# EAGLE board InkTime_2D-PCB (EAGLE 9.7.0)
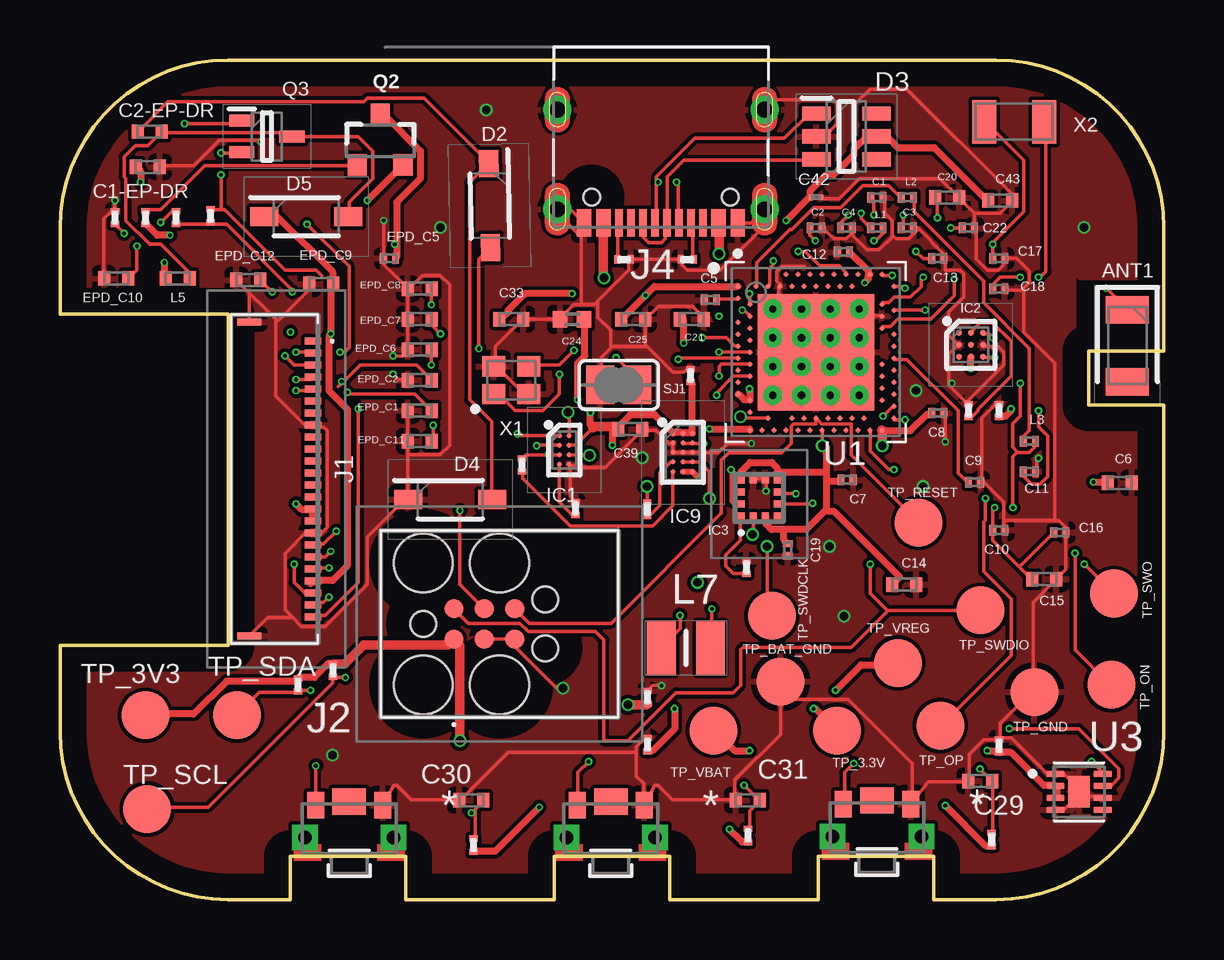
[diagram p0: board, top side]
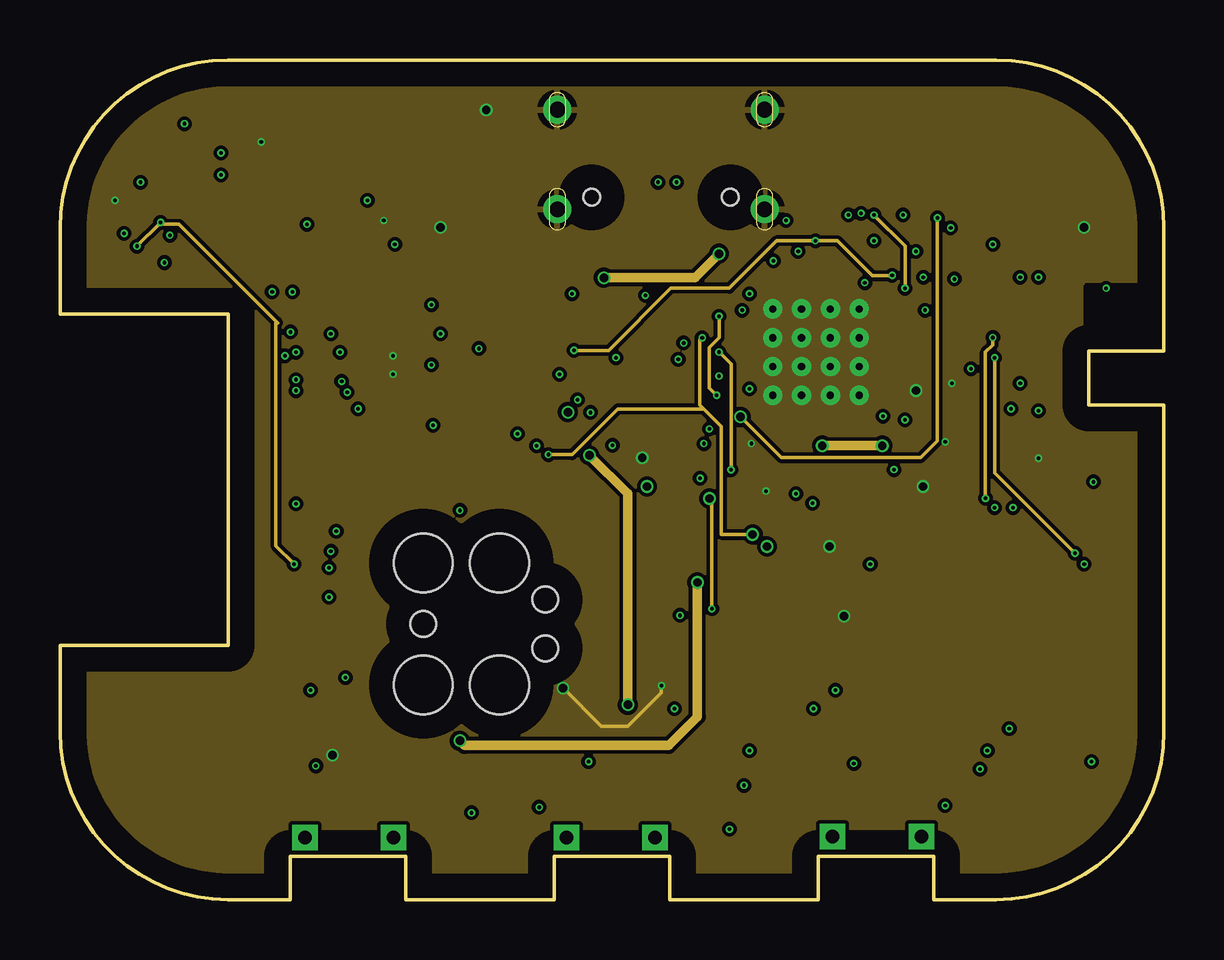
[diagram p1: board, inner layer Route2]
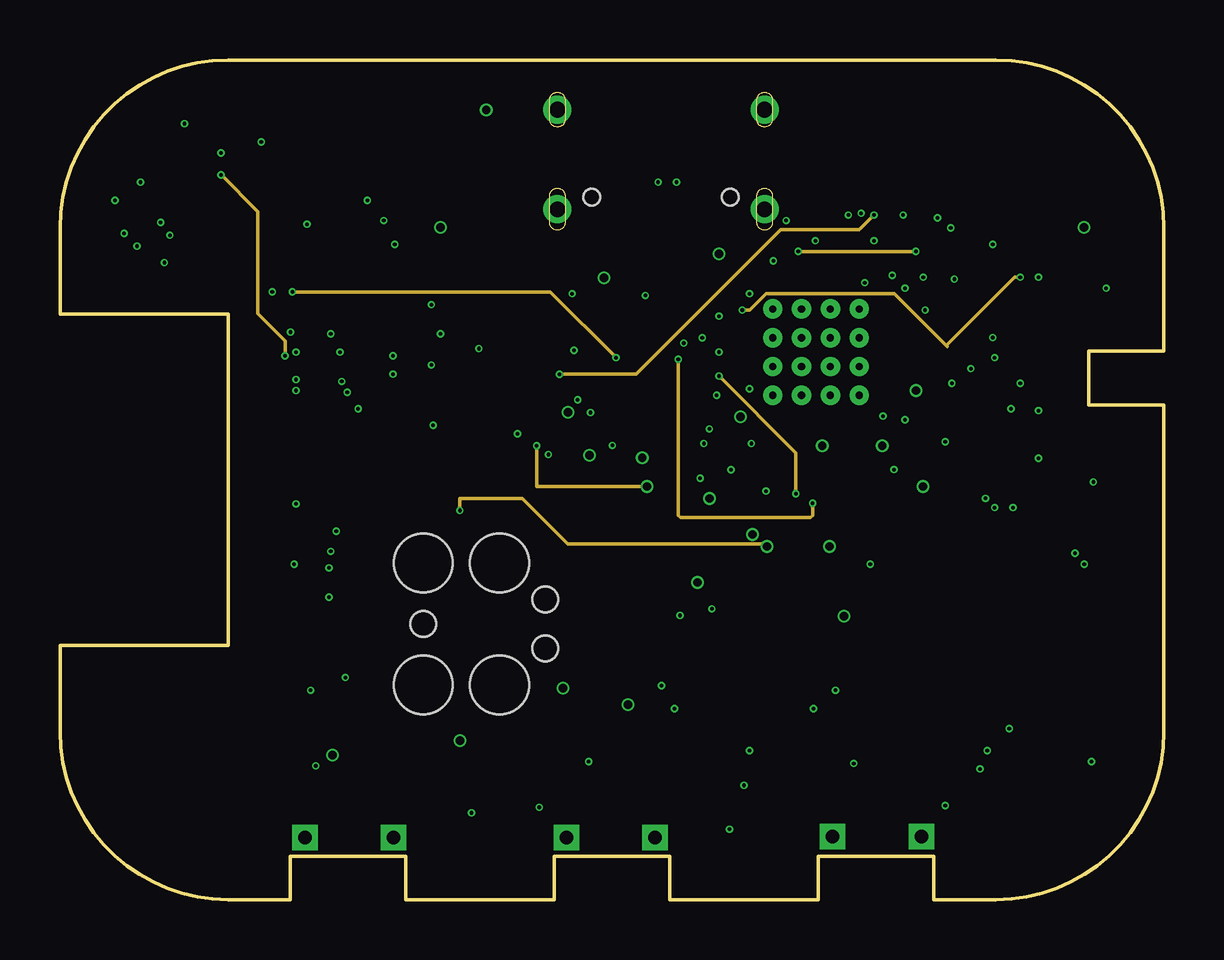
[diagram p2: board, inner layer Route15]
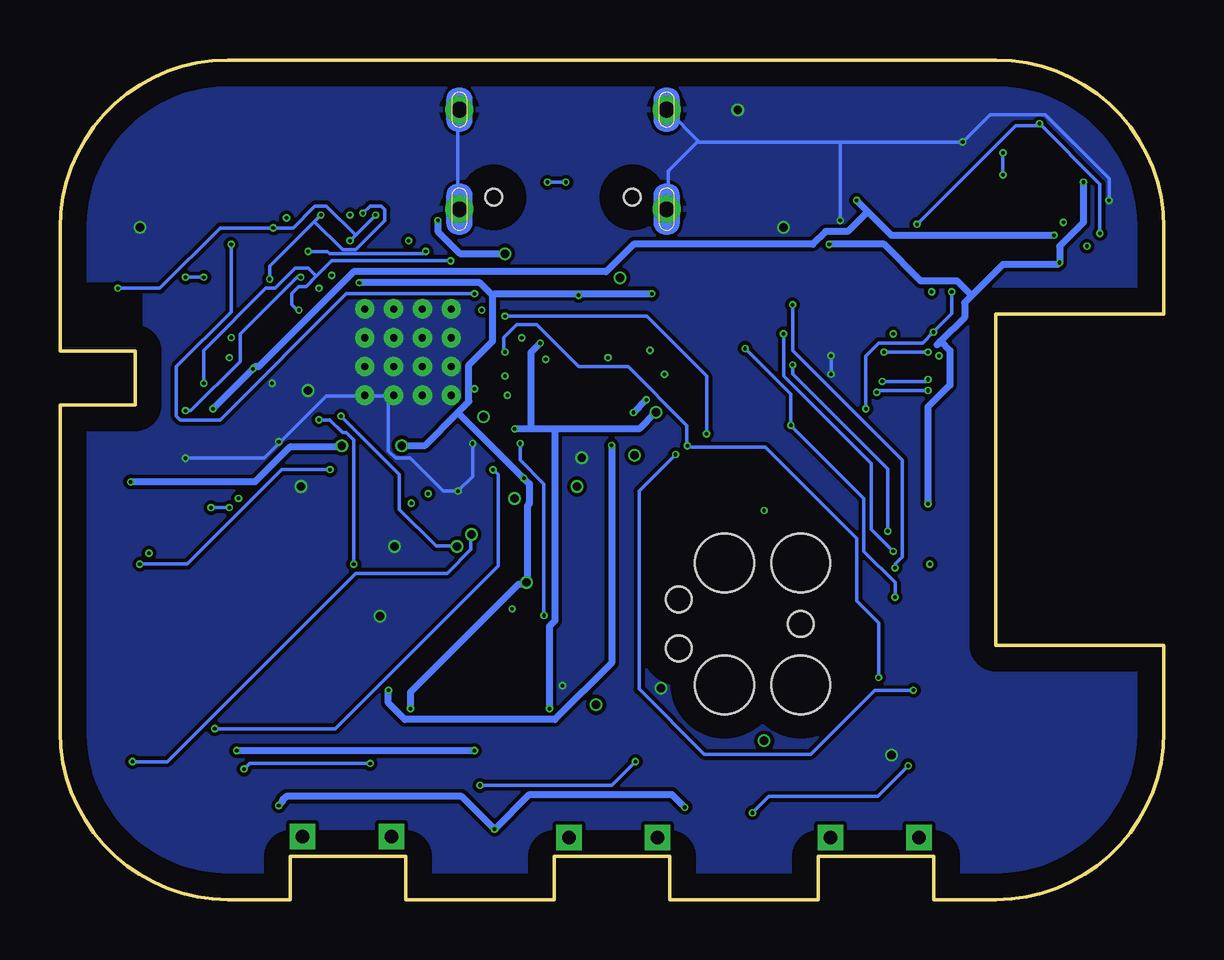
[diagram p3: board, bottom side, seen from below]

Size 46 x 35 mm. Coordinates in mm from the lower left corner, seen from the top.
Outline: 39,0 36.4,0 36.4,1.8 31.6,1.8 31.6,0 25.4,0 25.4,1.8 20.6,1.8 20.6,0 14.4,0 14.4,1.8 9.6,1.8 9.6,0 7,0 arc-90 0,7 0,10.6 7,10.6 7,24.4 0,24.4 0,28 arc-90 7,35 39,35 arc-90 46,28 46,22.87 42.86,22.87 42.86,20.62 46,20.62 46,7 arc-90 39,0
Copper layers (1+2*15+16): Top 0.035mm / dielectric 1.5mm / Route2 0.035mm / dielectric 0.15mm / Route15 0.035mm / dielectric 0.2mm / Bottom 0.035mm
Design rules "Fusion Electronics Design Rules *": minimum track width 6mil, minimum drill 0.15mm, track to track 6mil, track to pad 6mil, pad to pad 6mil, via to via 6mil, smd to smd 6mil, copper to edge 40mil, drill to drill 6mil, minimum pad ring 10mil, minimum via ring 0.075mm, stop-mask expansion 4mil, vias tented up to drill 9999mil, thermal gap 10mil
Net classes: 0 default: width 0.15 mm; 1 Putere: width 0.3 mm

## Footprints (pad centres in the part's own frame; a part is rotated, then mirrored left to right if it is on the bottom)
2450AT18B100E_ANTC3216X140N = smd 1.15 x 1.8: 1 -1.5,0; 2 1.5,0
NORDIC_NRF_3_RESC0201_L = smd 0.28 x 0.43: 1 -0.255,0; 2 0.255,0
NORDIC_NRF_3_RESC0402_L = smd 0.5 x 0.6: 1 -0.5,0; 2 0.5,0
GRM011R60J152KE01L_1_0201 = smd 0.35 x 0.25: 1 0,0.275; 2 0,-0.275
PERFECT_0402_0402 = smd 0.6 x 0.7: 1 -0.5,0; 2 0.5,0
GRM011R60J152KE01L_2_CAPC0201X13N = smd 0.22 x 0.23: 1 -0.185,0; 2 0.185,0
ESP32_C6_LIBRARY_5_SOD3716X135N = smd 1.15 x 0.8: 1 -1.75,0; 2 1.75,0
ESP32_C6_LIBRARY_3_SOT95P280X145-6N = smd 1.2 x 0.6: 1 -1.25,0.95; 2 -1.25,0; 3 -1.25,-0.95; 4 1.25,-0.95; 5 1.25,0; 6 1.25,0.95
BQ25180YBGR_BGA8C40P2X4_100X155X50 = smd 0.2 x 0.2: A1 -0.2,0.6; A2 0.2,0.6; B1 -0.2,0.2; B2 0.2,0.2; C1 -0.2,-0.2; C2 0.2,-0.2; D1 -0.2,-0.6; D2 0.2,-0.6
DRV2605YZFR_BGA9C50P3X3_144X144X62 = smd 0.25 x 0.25: A1 -0.5,0.5; A2 0,0.5; A3 0.5,0.5; B1 -0.5,0; B2 0,0; B3 0.5,0; C1 -0.5,-0.5; C2 0,-0.5; C3 0.5,-0.5
BMA423_BMA423 = smd 0.3 x 0.35: 1 -0.75,-0.775; 2 -0.25,-0.775; 3 0.25,-0.775; 4 0.75,-0.775; 7 0.75,0.775; 8 0.25,0.775; 9 -0.25,0.775; 10 -0.75,0.775 | smd 0.35 x 0.3: 5 0.775,-0.25; 6 0.775,0.25; 11 -0.775,0.25; 12 -0.775,-0.25
RT6160AWSC_BGA15C40P3X5_140X230X60 = smd 0.216 x 0.216: A1 -0.4,0.8; A2 0,0.8; A3 0.4,0.8; B1 -0.4,0.4; B2 0,0.4; B3 0.4,0.4; C1 -0.4,0; C2 0,0; C3 0.4,0; D1 -0.4,-0.4; D2 0,-0.4; D3 0.4,-0.4; E1 -0.4,-0.8; E2 0,-0.8; E3 0.4,-0.8
503480-2400_5034802400 = smd 0.3 x 0.7: 1 -5.75,1.525; 2 -5.25,1.525; 3 -4.75,1.525; 4 -4.25,1.525; 5 -3.75,1.525; 6 -3.25,1.525; 7 -2.75,1.525; 8 -2.25,1.525; 9 -1.75,1.525; 10 -1.25,1.525; 11 -0.75,1.525; 12 -0.25,1.525; 13 0.25,1.525; 14 0.75,1.525; 15 1.25,1.525; 16 1.75,1.525; 17 2.25,1.525; 18 2.75,1.525; 19 3.25,1.525; 20 3.75,1.525; 21 4.25,1.525; 22 4.75,1.525; 23 5.25,1.525; 24 5.75,1.525 | smd 0.3 x 1: MP1 -6.54,-1.125; MP2 6.54,-1.125
TC2030-IDC_TC2030IDC = smd 0.783 x 0.783: 1 -0.953,-0.635; 2 -0.953,0.635; 3 0.317,-0.635; 4 0.317,0.635; 5 1.588,-0.635; 6 1.588,0.635 | hole 2.451: -2.223,-2.54; -2.223,2.54; 0.952,-2.54; 0.952,2.54 | hole 1.067: -2.223,0; 2.857,-1.016; 2.857,1.016
KH-TYPE-C-16P_KINGHELM_KH-TYPE-C-16P = smd 0.6 x 1.15: A1_B12 -3.2,4.725; A4_B9 -2.4,4.725; A9_B4 2.4,4.725; A12_B1 3.2,4.725 | smd 0.3 x 1.15: A5 -1.25,4.725; A6 -0.25,4.725; A7 0.25,4.725; A8 1.25,4.725; B5 1.75,4.725; B6 0.75,4.725; B7 -0.75,4.725; B8 -1.75,4.725 | drill 0.65 pad 1.05: SH1 -4.32,0; SH2 4.32,0; SH3 -4.32,4.15; SH4 4.32,4.15 | hole 0.7: -2.89,3.65; 2.89,3.65
NORDIC_NRF_2_RESC0201_L = smd 0.28 x 0.43: 1 -0.255,0; 2 0.255,0
NORDIC_NRF_2_RESC0402_L = smd 0.5 x 0.6: 1 -0.5,0; 2 0.5,0
MLP2016SR47MT0S1_INDC2016X100N = smd 1.2 x 2.2: 1 -1.028,0; 2 1.028,0
ESP32_C6_LIBRARY_4_ESP32_C6_LIBRARY_4_ESP32_C6_LIBRARY_4_ESP32_C6_LIBRARY_4_ESP32_WROVER_SPARKFUN-DISCRETESEMI_SOT23-3 = smd 0.8 x 0.9: 1 -0.95,-1; 2 0.95,-1; 3 0,1.1
ESP32_C6_LIBRARY_6_SOT65P210X110-3N = smd 1.05 x 0.5: 1 -1.05,0.65; 2 -1.05,-0.65; 3 1.05,0
CPF0201D7K68C1_0201 = smd 0.35 x 0.25: 1 0,0.275; 2 0,-0.275
ERA-1AEB3401C_0201 = smd 0.35 x 0.25: 1 0,0.275; 2 0,-0.275
ESP32_C6_LIBRARY_7_JUMPER_SJ = smd 1.168 x 1.6: 1 -0.762,0; 2 0.762,0
2025-10-22_07-23-44_LIBRARY_SW_EVP-AKE31A_PAN = smd 0.711 x 1.092: 1 -1.4,-0.972; 2 1.4,-0.972 | drill 0.559 pad 0.914 square: 3 -1.848,0.381; 4 1.848,0.381 | smd 1.397 x 1.092: 5 0,-1.124
HECTOR_WATCH_1_TP20R = smd 2 x 2: TP 0,0
NORDIC_NRF_4_AQFN50P700X700X85_HS-74N = smd 4.85 x 4.85: P$74 0,0 | drill 0.3 pad 0.6: P$75 -1.8,1.8; P$76 -0.6,1.8; P$77 0.6,1.8; P$78 1.8,1.8; P$79 -1.8,0.6; P$80 -0.6,0.6; P$81 0.6,0.6; P$82 1.8,0.6; P$83 -1.8,-0.6; P$84 -0.6,-0.6; P$85 0.6,-0.6; P$86 1.8,-0.6; P$87 -1.8,-1.8; P$88 -0.6,-1.8; P$89 0.6,-1.8; P$90 1.8,-1.8 | smd 0.2 x 0.2: P$A8 -1.25,3.25; P$A10 -0.75,3.25; P$A12 -0.25,3.25; P$A14 0.25,3.25; P$A16 0.75,3.25; P$A18 1.25,3.25; P$A20 1.75,3.25; P$A22 2.25,3.25; P$A23 2.75,3.25; P$AA24 3.25,-2.25; P$AB2 -2.75,-2.5; P$AC5 -2,-2.75; P$AC9 -1,-2.75; P$AC11 -0.5,-2.75; P$AC13 0,-2.75; P$AC15 0.5,-2.75; P$AC17 1,-2.75; P$AC19 1.5,-2.75; P$AC21 2,-2.75; P$AC24 3.25,-2.75; P$AD2 -2.75,-3.25; P$AD4 -2.25,-3.25; P$AD6 -1.75,-3.25; P$AD8 -1.25,-3.25; P$AD10 -0.75,-3.25; P$AD12 -0.25,-3.25; P$AD14 0.25,-3.25; P$AD16 0.75,-3.25; P$AD18 1.25,-3.25; P$AD20 1.75,-3.25; P$AD22 2.25,-3.25; P$AD23 2.75,-3.25; P$B1 -3.25,2.75; P$B3 -2.5,2.75; P$B5 -2,2.75; P$B7 -1.5,2.75; P$B9 -1,2.75; P$B11 -0.5,2.75; P$B13 0,2.75; P$B15 0.5,2.75; P$B17 1,2.75; P$B19 1.5,2.75; P$B24 3.25,2.75; P$C1 -3.25,2.25; P$D2 -2.75,2; P$D23 2.75,2; P$E24 3.25,1.75; P$F2 -2.75,1.5; P$F23 2.75,1.5; P$G1 -3.25,1.25; P$H2 -2.75,1; P$H23 2.75,1; P$J1 -3.25,0.75; P$J24 3.25,0.75; P$K2 -2.75,0.5; P$L1 -3.25,0.25; P$L24 3.25,0.25; P$M2 -2.75,0; P$N1 -3.25,-0.25; P$N24 3.25,-0.25; P$P2 -2.75,-0.5; P$P23 2.75,-0.5; P$R1 -3.25,-0.75; P$R24 3.25,-0.75; P$T2 -2.75,-1; P$T23 2.75,-1; P$U1 -3.25,-1.25; P$U24 3.25,-1.25; P$V23 2.75,-1.5; P$W1 -3.25,-1.75; P$W24 3.25,-1.75; P$Y2 -2.75,-2; P$Y23 2.75,-2
ESP32_C6_LIBRARY_SON50P200X200X80-9N = smd 0.76 x 0.27: 1 -0.985,0.75; 2 -0.985,0.25; 3 -0.985,-0.25; 4 -0.985,-0.75; 5 0.985,-0.75; 6 0.985,-0.25; 7 0.985,0.25; 8 0.985,0.75 | smd 0.9 x 1.3: 9 0,0
NORDIC_NRF_BT-XTAL_2016_N = smd 0.95 x 0.85: 1 -0.725,-0.575; 2 0.725,-0.575; 3 0.725,0.575; 4 -0.725,0.575
NORDIC_NRF_1_XTAL_3215_N = smd 1 x 1.8: 1 -1.25,0; 2 1.25,0

## Placement (x,y rotation side)
ANT1  2450AT18B100E  [2450AT18B100E_ANTC3216X140N]  44.47,23.09 270 top
C1  12pF  [NORDIC_NRF_3_RESC0201_L]  34.04,29.27 0 top
C1-EP-DR  10uF  [NORDIC_NRF_3_RESC0402_L]  3.66,30.54 0 top
C2  12pF  [NORDIC_NRF_3_RESC0201_L]  31.5,28 0 top
C2-EP-DR  4.7uF/25V  [NORDIC_NRF_3_RESC0402_L]  3.73,32.01 0 top
C3  1pF  [NORDIC_NRF_3_RESC0201_L]  35.31,28 0 top
C4  1pF  [NORDIC_NRF_3_RESC0201_L]  32.77,28 0 top
C5  100nF  [NORDIC_NRF_3_RESC0201_L]  27.1,25 180 top
C6  4.7uF  [NORDIC_NRF_3_RESC0402_L]  44.16,17.37 0 top
C7  100nF  [NORDIC_NRF_3_RESC0201_L]  32.8,17.5 0 top
C8  100nF  [NORDIC_NRF_3_RESC0201_L]  36.58,20.28 0 top
C9  820pF N.C.  [NORDIC_NRF_3_RESC0201_L]  38.11,17.4 0 top
C10  N.C.  [NORDIC_NRF_3_RESC0201_L]  39.12,15.4 0 top
C11  100pF  [NORDIC_NRF_3_RESC0201_L]  40.39,17.84 0 top
C12  100nF  [NORDIC_NRF_3_RESC0201_L]  32.64,27 180 top
C13  N.C.  [NORDIC_NRF_3_RESC0201_L]  36.58,26.73 0 top
C14  4.7uF  [NORDIC_NRF_3_RESC0402_L]  35.17,13.13 0 top
C15  1.0uF  [NORDIC_NRF_3_RESC0402_L]  41.02,13.36 0 top
C16  47nF  [NORDIC_NRF_3_RESC0201_L]  41.66,15.3 0 top
C17  12pF  [NORDIC_NRF_3_RESC0201_L]  39.12,26.73 0 top
C18  12pF  [NORDIC_NRF_3_RESC0201_L]  39.12,25.46 0 top
C19  100nF  [NORDIC_NRF_3_RESC0201_L]  30.32,14.58 270 top
C20  4.7uF  [NORDIC_NRF_3_RESC0402_L]  36.96,29.27 0 top
C21  4.7uF  [NORDIC_NRF_3_RESC0402_L]  26.32,24.19 0 top
C22  N.C.  [NORDIC_NRF_3_RESC0201_L]  37.85,28 0 top
C23  0.1uF  [GRM011R60J152KE01L_1_0201]  26.27,21.84 0 top
C24  10uF  [PERFECT_0402_0402]  21.34,24.19 0 top
C25  22uF  [NORDIC_NRF_3_RESC0402_L]  23.88,24.19 0 top
C27  0.1uF  [GRM011R60J152KE01L_1_0201]  39.12,6.41 0 top
C29  1uF  [NORDIC_NRF_3_RESC0402_L]  38.35,4.94 0 top
C30  1uF  [NORDIC_NRF_3_RESC0402_L]  17.13,4.14 0 top
C31  1uF  [NORDIC_NRF_3_RESC0402_L]  28.66,4.14 0 top
C32  1uF  [GRM011R60J152KE01L_1_0201]  37.85,20.38 0 top
C33  22uF  [NORDIC_NRF_3_RESC0402_L]  18.8,24.19 0 top
C34  0.1uF  [GRM011R60J152KE01L_1_0201]  39.12,20.38 0 top
C37  1uF  [GRM011R60J152KE01L_1_0201]  24.48,8.43 0 top
C38  1uF  [GRM011R60J152KE01L_1_0201]  24.48,6.46 0 top
C39  10uF\  [NORDIC_NRF_3_RESC0402_L]  23.77,19.61 0 top
C42  0.1uF  [GRM011R60J152KE01L_2_CAPC0201X13N]  31.5,29.27 0 top
C43  4.7uF\  [NORDIC_NRF_3_RESC0402_L]  39.18,29.14 0 top
D2  MBR0530  [ESP32_C6_LIBRARY_5_SOD3716X135N]  17.9,28.93 271.1 top
D3  USBLC6-2SC6Y  [ESP32_C6_LIBRARY_3_SOT95P280X145-6N]  32.77,31.81 0 top
D4  MBR0530  [ESP32_C6_LIBRARY_5_SOD3716X135N]  16.26,16.67 0 top
D5  MBR0530  [ESP32_C6_LIBRARY_5_SOD3716X135N]  10.26,28.47 0 top
EPD_C1  1uF/50V  [NORDIC_NRF_3_RESC0402_L]  14.99,20.38 0 top
EPD_C2  1uF/50V  [NORDIC_NRF_3_RESC0402_L]  14.99,21.65 0 top
EPD_C5  0.1uF/50V  [NORDIC_NRF_3_RESC0201_L]  13.72,26.73 0 top
EPD_C6  1uF/50V  [NORDIC_NRF_3_RESC0402_L]  14.99,22.92 0 top
EPD_C7  1uF/50V  [NORDIC_NRF_3_RESC0402_L]  14.99,24.19 0 top
EPD_C8  1uF/50V  [NORDIC_NRF_3_RESC0402_L]  14.99,25.46 0 top
EPD_C9  1uF/50V  [NORDIC_NRF_3_RESC0402_L]  10.88,25.66 0 top
EPD_C10  1uF/50V  [NORDIC_NRF_3_RESC0402_L]  2.34,25.89 0 top
EPD_C11  1uF/50V  [NORDIC_NRF_3_RESC0402_L]  14.99,19.11 0 top
EPD_C12  1uF/50V  [NORDIC_NRF_3_RESC0402_L]  7.85,25.83 0 top
IC1  BQ25180YBGR  [BQ25180YBGR_BGA8C40P2X4_100X155X50]  21.01,18.74 0 top
IC2  DRV2605YZFR  [DRV2605YZFR_BGA9C50P3X3_144X144X62]  37.95,23.12 0 top
IC3  BMA421  [BMA423_BMA423]  29.13,16.74 0 top
IC9  RT6160AWSC  [RT6160AWSC_BGA15C40P3X5_140X230X60]  25.95,18.64 0 top
J1  503480-2400  [503480-2400_5034802400]  9.02,17.53 270 top
J2  TC2030-IDC  [TC2030-IDC_TC2030IDC]  17.36,11.49 0 top
J4  KH-TYPE-C-16P  [KH-TYPE-C-16P_KINGHELM_KH-TYPE-C-16P]  25.04,32.93 180 top
L1  3.9nH  [NORDIC_NRF_2_RESC0201_L]  34.04,28 0 top
L2  10uH  [NORDIC_NRF_2_RESC0201_L]  35.31,29.27 0 top
L3  15nH  [NORDIC_NRF_2_RESC0201_L]  40.39,19.11 0 top
L5  68uH  [NORDIC_NRF_2_RESC0402_L]  4.9,25.89 0 top
L7  FTC252012SR47MBCA  [MLP2016SR47MT0S1_INDC2016X100N]  26.08,10.49 0 top
Q2  20V/4.2A/52mΩ/1.4W  [ESP32_C6_LIBRARY_4_ESP32_C6_LIBRARY_4_ESP32_C6_LIBRARY_4_ESP32_C6_LIBRARY_4_ESP32_WROVER_SPARKFUN-DISCRETESEMI_SOT23-3]  13.34,31.62 0 top
Q3  SI1308EDL-T1-GE3  [ESP32_C6_LIBRARY_6_SOT65P210X110-3N]  8.62,31.81 0 top
R1_EP_DR  0.47  [CPF0201D7K68C1_0201]  6.27,28.5 180 top
R1_USB  5K1  [CPF0201D7K68C1_0201]  26.13,26.68 90 top
R2  0  [CPF0201D7K68C1_0201]  19.25,18.11 0 top
R2_EP_DR  10K  [CPF0201D7K68C1_0201]  2.29,28.43 0 top
R2_USB  5K1  [CPF0201D7K68C1_0201]  23.5,26.68 90 top
R3  0  [CPF0201D7K68C1_0201]  28.6,13.84 0 top
R4  0  [CPF0201D7K68C1_0201]  24.47,16.27 0 top
R5  CPF0201D7K68C1_CPF0201D7K68C1  [CPF0201D7K68C1_0201]  17.23,2.27 0 top
R7  CPF0201D7K68C1_CPF0201D7K68C1  [CPF0201D7K68C1_0201]  38.82,2.5 0 top
R8  CPF0201D7K68C1_CPF0201D7K68C1  [CPF0201D7K68C1_0201]  28.66,2.67 0 top
R9  10K  [ERA-1AEB3401C_0201]  21.48,16.3 0 top
R17  3K3  [CPF0201D7K68C1_0201]  11.38,9.55 0 top
R18  3K3  [CPF0201D7K68C1_0201]  9.91,8.95 0 top
R_PWR_EPD1  10K  [CPF0201D7K68C1_0201]  3.56,28.43 0 top
R_TYPE_SEL  2.2  [CPF0201D7K68C1_0201]  4.83,28.43 0 top
SJ1  [ESP32_C6_LIBRARY_7_JUMPER_SJ]  23.28,21.45 0 top
SW_DN  2025-10-22_07-23-44_LIBRARY_EVP-AKE31ASW_EVP-AKE31A_PAN  [2025-10-22_07-23-44_LIBRARY_SW_EVP-AKE31A_PAN]  34.04,3.01 180 top
SW_ENT  2025-10-22_07-23-44_LIBRARY_EVP-AKE31ASW_EVP-AKE31A_PAN  [2025-10-22_07-23-44_LIBRARY_SW_EVP-AKE31A_PAN]  22.95,2.96 180 top
SW_UP  2025-10-22_07-23-44_LIBRARY_EVP-AKE31ASW_EVP-AKE31A_PAN  [2025-10-22_07-23-44_LIBRARY_SW_EVP-AKE31A_PAN]  12.05,2.96 180 top
TP_3.3V  HECTOR_WATCH_1_TPTP20R  [HECTOR_WATCH_1_TP20R]  32.37,7.05 0 top
TP_3V3  HECTOR_WATCH_1_TPTP20R  [HECTOR_WATCH_1_TP20R]  3.56,7.68 0 top
TP_BAT_GND  HECTOR_WATCH_1_TPTP20R  [HECTOR_WATCH_1_TP20R]  30.03,9.09 0 top
TP_GND  HECTOR_WATCH_1_TPTP20R  [HECTOR_WATCH_1_TP20R]  40.6,8.65 0 top
TP_ON  HECTOR_WATCH_1_TPTP20R  [HECTOR_WATCH_1_TP20R]  43.81,8.95 0 top
TP_OP  HECTOR_WATCH_1_TPTP20R  [HECTOR_WATCH_1_TP20R]  36.68,7.25 0 top
TP_RESET  HECTOR_WATCH_1_TPTP20R  [HECTOR_WATCH_1_TP20R]  35.77,15.72 0 top
TP_SCL  HECTOR_WATCH_1_TPTP20R  [HECTOR_WATCH_1_TP20R]  3.63,3.77 0 top
TP_SDA  HECTOR_WATCH_1_TPTP20R  [HECTOR_WATCH_1_TP20R]  7.37,7.68 0 top
TP_SWDCLK  HECTOR_WATCH_1_TPTP20R  [HECTOR_WATCH_1_TP20R]  29.66,11.83 0 top
TP_SWDIO  HECTOR_WATCH_1_TPTP20R  [HECTOR_WATCH_1_TP20R]  38.35,12.06 0 top
TP_SWO  HECTOR_WATCH_1_TPTP20R  [HECTOR_WATCH_1_TP20R]  43.91,12.76 0 top
TP_VBAT  HECTOR_WATCH_1_TPTP20R  [HECTOR_WATCH_1_TP20R]  27.22,7.05 0 top
TP_VREG  HECTOR_WATCH_1_TPTP20R  [HECTOR_WATCH_1_TP20R]  34.91,9.86 0 top
U1  NRF52840_QF  [NORDIC_NRF_4_AQFN50P700X700X85_HS-74N]  31.5,22.82 0 top
U3  MAX17048G+T10  [ESP32_C6_LIBRARY_SON50P200X200X80-9N]  42.46,4.5 0 top
X1  32MHz  [NORDIC_NRF_BT-XTAL_2016_N]  18.8,21.65 0 top
X2  32.768KHz  [NORDIC_NRF_1_XTAL_3215_N]  39.76,32.42 180 top

## Library data of the parts
ANT1 = InkTime_v5; ARROW_PART_NUMBER: 2450AT18B100E; ARROW_PRICE-STOCK: https://www.arrow.com/en/products/2450at18b100e/johanson-dielectrics?utm_currency=USD&region=nac; DESCRIPTION: Antennas 2.45GHz ANTENNA; HEIGHT: 1.4mm; MANUFACTURER_NAME: JOHANSON TECHNOLOGY; MANUFACTURER_PART_NUMBER: 2450AT18B100E; MOUSER_PART_NUMBER: 609-2450AT18B100E; MOUSER_PRICE-STOCK: https://www.mouser.co.uk/ProductDetail/Johanson-Technology/2450AT18B100E?qs=yCnrNFeXz%252Bh5MFsFIXGZGA%3D%3D
C1-C25 C27 C29-C34 C37-C39 C43 EPD_C1 EPD_C2 EPD_C5-EPD_C12 L1-L3 R1_USB R2 R2_USB R3-R5 R7-R9 R17 R18 TP_3.3V TP_3V3 TP_BAT_GND TP_GND TP_ON TP_OP TP_RESET TP_SCL TP_SDA TP_SWDCLK TP_SWDIO TP_SWO TP_VBAT TP_VREG U1 X1 X2 = InkTime_v5
C1-EP-DR C2-EP-DR L5 R1_EP_DR R2_EP_DR R_PWR_EPD1 R_TYPE_SEL SJ1 = Libraria_DANI
C42 = InkTime_v5; AVAILABILITY: In Stock; CHECK_PRICES: https://www.snapeda.com/parts/GRM011R60J152KE01L/Murata/view-part/?ref=eda; DESCRIPTION: SMD Capacitor X5R(EIA) with Capacitance: 1500pF Tol. 10%. Rated Voltage: 6.3Vdc; MF: Murata; MP: GRM011R60J152KE01L; PACKAGE: 0201 Murata; PRICE: None; SNAPEDA_LINK: https://www.snapeda.com/parts/GRM011R60J152KE01L/Murata/view-part/?ref=snap
D2 D4 D5 = Libraria_DANI; AVAILABILITY: In Stock; CHECK_PRICES: https://www.snapeda.com/parts/MBR0530/Onsemi/view-part/?ref=eda; DESCRIPTION: Diode Schottky 30 V 500mA Surface Mount SOD-123; MF: ON Semiconductor; MP: MBR0530; PACKAGE: SOD-123-2 ON Semiconductor; PRICE: None; PURCHASE-URL: https://www.snapeda.com/api/url_track_click_mouser/?unipart_id=179458&manufacturer=ON Semiconductor&part_name=MBR0530&search_term=None; SNAPEDA_LINK: https://www.snapeda.com/parts/MBR0530/Onsemi/view-part/?ref=snap
D3 = InkTime_v5; AVAILABILITY: In Stock; CHECK_PRICES: https://www.snapeda.com/parts/USBLC6-2SC6Y/STMicroelectronics/view-part/?ref=eda; DESCRIPTION: 17V Clamp 5A (8/20µs) Ipp Tvs Diode Surface Mount SOT-23-6; MF: STMicroelectronics; MP: USBLC6-2SC6Y; PACKAGE: SOT-23-6 STMicroelectronics; PRICE: None; SNAPEDA_LINK: https://www.snapeda.com/parts/USBLC6-2SC6Y/STMicroelectronics/view-part/?ref=snap
IC1 = InkTime_v5; ARROW_PART_NUMBER: BQ25180YBGR; ARROW_PRICE-STOCK: https://www.arrow.com/en/products/bq25180ybgr/texas-instruments?utm_currency=USD&region=nac; DESCRIPTION: Charger IC Lithium Ion/Polymer, Lithium Iron Phosphate 8-DSBGA (1.6x1.1); HEIGHT: 0.5mm; MANUFACTURER_NAME: Texas Instruments; MANUFACTURER_PART_NUMBER: BQ25180YBGR; MOUSER_PART_NUMBER: 595-BQ25180YBGR; MOUSER_PRICE-STOCK: https://www.mouser.co.uk/ProductDetail/Texas-Instruments/BQ25180YBGR?qs=doiCPypUmgEWjAK%252BJAX6Tw%3D%3D
IC2 = InkTime_v5; ARROW_PART_NUMBER: DRV2605YZFR; ARROW_PRICE-STOCK: https://www.arrow.com/en/products/drv2605yzfr/texas-instruments?region=nac; DESCRIPTION: Haptic Driver for ERM/LRA with Built-In Library and Smart Loop Architecture; HEIGHT: 0.625mm; MANUFACTURER_NAME: Texas Instruments; MANUFACTURER_PART_NUMBER: DRV2605YZFR
IC3 = InkTime_v5; ARROW_PART_NUMBER: BMA423; ARROW_PRICE-STOCK: https://www.arrow.com/en/products/bma423/bosch; DESCRIPTION: Accelerometers Triaxial low-g 12bit Acceleration Sensor; HEIGHT: 1mm; MANUFACTURER_NAME: BOSCH; MANUFACTURER_PART_NUMBER: BMA423; MOUSER_PART_NUMBER: 262-BMA423; MOUSER_PRICE-STOCK: https://www.mouser.co.uk/ProductDetail/Bosch-Sensortec/BMA423?qs=HXFqYaX1Q2xC%252BSgeGoX3mg%3D%3D
IC9 = InkTime_v5; DESCRIPTION: Buck-Boost Regulator Positive Output Step-Up/Step-Down I2C DC-DC Controller IC 15-WL-CSP (BSC) (1.4x2.3); HEIGHT: 0.6mm; MANUFACTURER_NAME: RICHTEK; MANUFACTURER_PART_NUMBER: RT6160AWSC; MOUSER_PART_NUMBER: 835-RT6160AWSC; MOUSER_PRICE-STOCK: https://www.mouser.co.uk/ProductDetail/Richtek/RT6160AWSC?qs=amGC7iS6iy%2FLd9PSoixZXQ%3D%3D
J1 = InkTime_v5; DESCRIPTION: FFC & FPC Connectors 0.5mm FPC RA SMT Dual Contact 24Ckt; HEIGHT: 1.87mm; MANUFACTURER_NAME: Molex; MANUFACTURER_PART_NUMBER: 503480-2400; MOUSER_PART_NUMBER: 538-503480-2400; MOUSER_PRICE-STOCK: https://www.mouser.co.uk/ProductDetail/Molex/503480-2400?qs=OAhjpuo3Vu7efIoxFh9AOw%3D%3D
J2 = InkTime_v5; DESCRIPTION: CABLE ADAPTER 6 POS; HEIGHT: 19mm; MANUFACTURER_NAME: Tag Connect; MANUFACTURER_PART_NUMBER: TC2030-IDC
J4 = InkTime_v5; AVAILABILITY: Not in stock; CHECK_PRICES: https://www.snapeda.com/parts/KH-TYPE-C-16P/Kinghelm/view-part/?ref=eda; MF: kinghelm; MP: KH-TYPE-C-16P; PACKAGE: None; PRICE: None; SNAPEDA_LINK: https://www.snapeda.com/parts/KH-TYPE-C-16P/Kinghelm/view-part/?ref=snap
L7 = InkTime_v5; DESCRIPTION: SMD / SMT Inductors (Coils), L=0.47?H, L x W x T :; HEIGHT: 1mm; JLCPCB: https://jlcpcb.com/partdetail/6763488-FTC252012SR47MBCA/C5832368; MANUFACTURER_NAME: TDK; MANUFACTURER_PART_NUMBER: FTC252012SR47MBCA
Q2 = Libraria_DANI; PROD_ID: TRAN-14388
Q3 = Libraria_DANI; AVAILABILITY: In Stock; CHECK_PRICES: https://www.snapeda.com/parts/SI1308EDL-T1-GE3/Vishay+Siliconix/view-part/?ref=eda; DESCRIPTION: Si1308EDL-T1-GE3 N-channel MOSFET Transistor, 1.5 A, 30 V, 3-Pin SC-70 | Siliconix / Vishay SI1308EDL-T1-GE3; MF: Vishay Siliconix; MP: SI1308EDL-T1-GE3; PACKAGE: SOT-323 Vishay Semiconductor; PRICE: None; PURCHASE-URL: https://www.snapeda.com/api/url_track_click_mouser/?unipart_id=274603&manufacturer=Vishay Siliconix&part_name=SI1308EDL-T1-GE3&search_term=None; SNAPEDA_LINK: https://www.snapeda.com/parts/SI1308EDL-T1-GE3/Vishay+Siliconix/view-part/?ref=snap
SW_DN SW_ENT SW_UP = InkTime_v5; COPYRIGHT: Copyright (C) 2025 Ultra Librarian. All rights reserved.; DIGI-KEY_PART_NUMBER_1: P123437TR-ND; DIGI-KEY_PART_NUMBER_2: P123437CT-ND; DIGI-KEY_PART_NUMBER_3: P123437DKR-ND; MANUFACTURER_NAME: Panasonic; MANUFACTURER_PART_NUMBER: EVP-AKE31A
U3 = InkTime_v5; AVAILABILITY: In Stock; CHECK_PRICES: https://www.snapeda.com/parts/MAX17048G+T10/Analog+Devices/view-part/?ref=eda; DESCRIPTION: 3µA 1-Cell/2-Cell Fuel Gauge with ModelGauge; MF: Analog Devices; MP: MAX17048G+T10; PACKAGE: TDFN-8 Maxim; PRICE: None; PURCHASE-URL: https://www.snapeda.com/api/url_track_click_mouser/?unipart_id=329239&manufacturer=Analog Devices&part_name=MAX17048G+T10&search_term=None; SNAPEDA_LINK: https://www.snapeda.com/parts/MAX17048G+T10/Analog+Devices/view-part/?ref=snap

## Nets
3V3/1.7D [Putere]: C34.2 IC2.C2 Q2.2 R_PWR_EPD1.2
3V3/1.7D1 [Putere]: R5.2 R7.2 R8.2
3V3/2.4A [Putere]: C6.1 C7.1 C8.1 C12.1 C14.1 C19.1 C25.1 C33.1 IC3.3 IC3.7 IC3.10 IC9.E2 IC9.E3 J2.1 R17.1 R18.1 TP_3.3V.TP TP_3V3.TP U1.P$A22 U1.P$AD14 U1.P$AD23 U1.P$B1 U1.P$W1 U1.P$Y2
ALERT/1.6C: U3.5
ALERT/2.5C: U1.P$J24
D+/1.5D: D3.4
D+/2.7D: U1.P$AD6
D-/1.5D: D3.6
D-/2.7D: U1.P$AD4
DN: D3.1 J4.A7 J4.B7
DP: D3.3 J4.A6 J4.B6
EPD_3V3 [Putere]: C1-EP-DR.1 EPD_C5.2 J1.15 J1.16 L5.1 Q2.3
EPD_BUSY/1.5D: J1.9
EPD_BUSY/2.2D: U1.P$AD12
EPD_CS/1.4C: J1.12
EPD_CS/2.2D: U1.P$K2
EPD_DC/1.5D: J1.11
EPD_DC/2.2D: U1.P$AD10
EPD_RST/1.5D: J1.10
EPD_RST/2.2D: U1.P$AC11
GDR: J1.2 Q3.1 R2_EP_DR.2
GND: C1-EP-DR.2 C1.2 C2.2 C3.2 C4.2 C5.2 C6.2 C7.2 C8.2 C9.2 C10.2 C11.2 C12.2 C13.2 C14.2 C15.2 C16.2 C17.2 C18.2 C19.2 C20.2 C21.2 C22.2 C23.1 C24.1 C25.2 C27.1 C29.1 C30.1 C31.1 C32.1 C33.2 C34.1 C37.1 C38.1 C39.2 C42.2 C43.2 D3.2 D4.1 EPD_C1.1 EPD_C2.1 EPD_C5.1 EPD_C6.1 EPD_C7.1 EPD_C8.1 EPD_C9.1 EPD_C10.1 EPD_C11.1 EPD_C12.1 IC1.D2 IC2.B1 IC2.B3 IC3.8 IC3.9 IC9.B1 IC9.C1 IC9.C2 IC9.C3 J1.8 J1.17 J1.MP1 J1.MP2 J2.3 J2.5 J4.A1_B12 J4.A12_B1 J4.SH1 J4.SH2 J4.SH3 J4.SH4 R1_USB.1 R2_EP_DR.1 R2_USB.2 R3.1 R9.1 SJ1.1 SW_DN.1 SW_ENT.1 SW_UP.1 TP_BAT_GND.TP TP_GND.TP U1.P$74 U1.P$75 U1.P$76 U1.P$77 U1.P$78 U1.P$79 U1.P$80 U1.P$81 U1.P$82 U1.P$83 U1.P$84 U1.P$85 U1.P$86 U1.P$87 U1.P$88 U1.P$89 U1.P$90 U1.P$B7 U1.P$F23 U3.1 U3.4 U3.6 U3.9 X1.2 X1.4
HAPTIC_EN/1.4C: IC2.A1
HAPTIC_EN/2.6A: U1.P$U1
IMU_INT1: IC3.5 U1.P$N1
IMU_INT2: IC3.6 U1.P$P2
LX1: IC9.B2 IC9.B3 L7.1
LX2: IC9.D2 IC9.D3 L7.2
MOSI/1.5B: J1.14
MOSI/2.2D: U1.P$B13
N$1: C13.1 U1.P$A18
N$2: C20.1 U1.P$AC5
N$3: C9.1 U1.P$N24
N$4: L2.1 U1.P$B3
N$5: L2.2 L3.1
N$6: C10.1 C15.1 C16.1 L3.2 U1.P$B5 U1.P$E24
N$7: C5.1 U1.P$C1
N$8: C17.1 U1.P$D2 X2.2
N$9: C18.1 U1.P$F2 X2.1
N$10: C11.1 U1.P$D23
N$11: C2.1 U1.P$A23 X1.3
N$12: C1.1 U1.P$B24 X1.1
N$13: ANT1.1 C4.1 C22.1 L1.2
N$14: C3.1 L1.1 U1.P$H23
N$15: IC9.D1 R4.2
N$16: IC9.E1 R2.2
N$17: IC1.D1 R9.2
N$18: EPD_C2.2 J1.4
N$19: EPD_C1.2 J1.5
N$20: EPD_C6.2 J1.18
N$21: EPD_C7.2 J1.19
N$22: EPD_C8.2 J1.20
N$23: IC3.1 R3.2
N$24: EPD_C10.2 J1.22 R_TYPE_SEL.1
N$25: EPD_C12.2 J1.24
N$26: C32.2 IC2.A2
N$27: C2-EP-DR.2 D5.2 L5.2 Q3.3
N$28: C2-EP-DR.1 D2.1 D4.2
N$29: R1_EP_DR.1 R_TYPE_SEL.2 SJ1.2
N$30: J4.A5 R1_USB.2
N$31: J4.B5 R2_USB.1
OUT+: IC2.A3 TP_OP.TP
OUT-: IC2.C3 TP_ON.TP
P0.04: U1.P$J1
P0.09: U1.P$L24
P0.13/1.5D: C30.2 R5.1 SW_UP.2
P0.13/2.6C: U1.P$AD8
P0.14/1.5D: C31.2 R8.1 SW_ENT.2
P0.14/2.7C: U1.P$AC9
P0.19: U1.P$AC15
P0.20: U1.P$AD16
P0.21: U1.P$AC17
P0.22: U1.P$AD18
P0.23: U1.P$AC19
P0.24: U1.P$AD20
P0.25: U1.P$AC21
P0.26: U1.P$G1
P0.27: U1.P$H2
P0.28: U1.P$B11
P0.29: U1.P$A10
P0.30: U1.P$B9
P0.31: U1.P$A8
P1.01/1.6C: Q2.1 R_PWR_EPD1.1
P1.01/2.4B: U1.P$Y23
P1.02/1.6C: C29.2 R7.1 SW_DN.2
P1.02/2.8C: U1.P$W24
P1.03: U1.P$V23
P1.04: U1.P$U24
P1.05: U1.P$T23
P1.06: U1.P$R24
P1.07: U1.P$P23
P1.09: U1.P$R1
P1.10: U1.P$A20
P1.11: U1.P$B19
P1.12: U1.P$B17
P1.13: U1.P$A16
P1.14: U1.P$B15
P1.15: U1.P$A14
PMIC_INT: IC1.A1 U1.P$T2
PREVGH [Putere]: D5.1 EPD_C9.2 J1.21
PREVGL: D2.2 EPD_C11.2 J1.23
RESE: J1.3 Q3.2 R1_EP_DR.2
RESET: J2.6 TP_RESET.TP U1.P$AC13
SCK/1.5B: J1.13
SCK/2.2D: U1.P$A12
SCL/1.4C: IC2.C1
SCL/2.4C: IC1.B1 IC3.12 R4.1 R17.2 TP_SCL.TP U1.P$M2 U3.7
SDA/1.4C: IC2.B2
SDA/2.4C: IC1.C1 IC3.2 R2.1 R18.2 TP_SDA.TP U1.P$L1 U3.8
SWDCLK: J2.4 TP_SWDCLK.TP U1.P$AA24
SWDIO: J2.2 TP_SWDIO.TP U1.P$AC24
SWO: TP_SWO.TP U1.P$AD22
VBAT/1.2A [Putere]: C27.2 TP_VBAT.TP U3.2 U3.3
VBAT/2.5C [Putere]: C37.2 IC1.C2
VBUS/1.5D [Putere]: C42.1 C43.1 D3.5 J4.A4_B9 J4.A9_B4
VBUS/2.6D [Putere]: C21.1 C38.2 IC1.A2 U1.P$AD2
VREG [Putere]: C23.2 C24.2 C39.1 IC1.B2 IC9.A1 IC9.A2 IC9.A3 TP_VREG.TP

## Tracks (layer width: path | path; a pad name or v marks a point on that pad's centre or on a via)
3V3/1.7D  (via drill 0.15)
  Top 0.3: v37.95,22.13 37.95,22.59 IC2.C2 | v39.63,20.46 39.63,20.38 39.4,20.15 39.17,20.15 C34.2 | v4.58,27.7 4.04,27.7 3.59,28.15 R_PWR_EPD1.2 | v12.81,29.14 14.25,30.59 Q2.2
  Bottom 0.3: v39.63,20.46 v37.95,22.13 37.87,22.21 37.72,22.21 33.76,26.17 23.24,26.17 22.1,27.31 14.63,27.31 14.1,27.85 13.19,27.85 12.35,28.69 | v4.58,27.7 11.36,27.7 12.35,28.69 | v12.81,29.14 12.35,28.69
3V3/1.7D1  (via drill 0.15)
  Top 0.3: v19.97,3.84 18.14,2.02 17.3,2.02 R5.2 | v27.89,2.93 28.43,2.4 R8.2 | v36.88,3.92 38.56,2.24 38.79,2.24 R7.2
  Bottom 0.3: v19.97,3.84 20.5,4.38 26.45,4.38 v27.89,2.93 29.26,4.3 36.58,4.3 36.73,4.15 36.73,4.07 v36.88,3.92
3V3/2.4A  (via drill 0.15, 0.35)
  Top 0.152: U1.P$AD14 v31.76,18.92
  Top 0.254: IC9.E2 IC9.E3 26.63,17.56 v26.67,17.56
  Top 0.3: U1.P$B1 28.2,25.56 24.77,25.56 v24.39,25.18 23.4,24.19 C25.1 | C14.1 34.98,13.45 32.24,16.19 32.01,16.19 31.93,16.27 | 43.67,17.33 C6.1 43.62,17.41 v43.06,17.41 | R17.1 11.2,9.86 10.6,9.26 9.91,9.26 R18.1 9.83,9.1 6.94,9.1 5.57,7.73 3.59,7.73 TP_3V3.TP | U1.P$W1 28.27,21.07 28.5,20.84 28.73,20.84 U1.P$Y2 28.73,20.91 v28.73,21.29 | 33.68,26.02 33.68,25.87 v33.53,25.71 | 33.68,26.02 U1.P$A22 | 30.16,15.43 31.09,15.43 31.93,16.27 | 30.16,15.43 29.65,15.43 29.42,15.66 29.42,15.96 IC3.3 | 31.93,17.82 31.93,18.86 v31.76,18.92 | 31.93,17.82 31.93,17.42 | 31.93,17.42 31.93,16.27 | 34.26,19.54 35.44,19.54 36.12,20.23 36.27,20.23 C8.1 | v21.34,25.26 19.36,25.26 18.67,24.57 18.67,24.5 18.37,24.19 C33.1 | v31.4,7.96 31.48,7.96 32.31,7.12 TP_3.3V.TP | C19.1 30.16,14.99 30.16,15.43 | C12.1 33.68,26.21 33.68,26.02 | C7.1 32.46,17.42 31.93,17.42 | IC3.10 28.38,17.84 28.76,18.22 29.66,18.22 29.88,18 29.88,17.82 | 29.88,17.82 IC3.7 | 29.88,17.82 31.93,17.82
  Top 0.4: R17.1 11.86,9.83 12.66,10.62 16.17,10.62 J2.1 16.66,10.6 v16.66,6.62 | U1.P$AD23 34.26,19.54 v34.26,18.92
  Route2 0.4: v16.66,6.62 16.86,6.42 25.36,6.42 26.56,7.62 v26.56,13.22 | v31.76,18.92 v34.26,18.92
  Bottom 0.3: v33.53,25.71 28.5,25.71 27.97,25.18 | 27.97,25.18 27.97,23.28 28.96,22.29 28.96,21.29 | 28.96,21.29 28.96,20.76 29.42,20.3 | 29.42,20.3 30.79,18.93 31.7,18.93 v31.76,18.92 | 29.42,20.3 v26.67,17.56 26.45,17.33 26.45,16.49 26.52,16.42 26.52,13.29 v26.56,13.22 26.67,13.14 26.9,13.14 31.4,8.65 v31.4,7.96 | 28.96,21.29 v28.73,21.29 | 24.39,25.26 27.89,25.26 27.97,25.18 | 24.39,25.26 v21.34,25.26 | v43.06,17.41 37.87,17.41 36.43,18.86 34.29,18.86 v34.26,18.92 | v24.39,25.18 24.39,25.26
DN  (via drill 0.15)
  Top 0.152: 24.84,29.91 24.84,30.13 26.45,31.73 30.18,31.73 31.17,32.72 31.48,32.72 D3.1 | 24.84,29.91 24.84,28.23 J4.A7 | v25.68,29.91 25.76,29.83 25.76,28.23 J4.B7 | 24.84,29.91 v24.92,29.91
  Bottom 0.152: v24.92,29.91 v25.68,29.91
DP
  Top 0.152: J4.B6 24.31,28.15 24.31,27.62 24.54,27.39 25.07,27.39 25.23,27.54 25.23,28.15 J4.A6 25.3,28.23 25.3,30.13 25.99,30.82 31.48,30.82 D3.3
EPD_3V3  (via drill 0.15)
  Top 0.3: 14.02,27.31 14.02,29.07 15.02,30.06 15.02,31.2 13.57,32.65 13.41,32.65 Q2.3 | 14.02,27.31 14.02,26.78 EPD_C5.2 | 10.53,15.78 J1.16 10.52,15.88 10.52,16.11 10.49,16.22 J1.15 10.37,16.27 10.06,16.27 v9.83,16.49 | v4.35,26.55 4.35,25.94 L5.1 | v3.36,29.91 3.36,30.36 3.2,30.52 C1-EP-DR.1 | v13.95,27.31 14.02,27.31
  Bottom 0.3: v3.36,29.91 3.36,28.23 4.35,27.24 v4.35,26.55 4.42,26.48 6.71,26.48 8,25.18 | 9.3,23.28 8.31,24.27 8.31,24.88 8,25.18 | 9.3,23.28 9.45,23.12 | v13.95,27.31 11.66,27.31 10.14,25.79 8.61,25.79 8,25.18 | v9.83,16.49 9.83,20.53 8.92,21.45 8.92,22.9 9.3,23.28
GDR  (via drill 0.15)
  Top 0.152: v2.67,27.77 R2_EP_DR.2 | v5.19,32.34 7.47,32.34 7.55,32.42 Q3.1 | v10.29,28.15 12.04,26.4 12.04,23 11.86,22.82 v11.66,22.82 | v9.83,22.82 10.52,22.82 J1.2
  Bottom 0.152: v2.67,27.77 2.67,29.83 v5.19,32.34 5.19,32.27 6.18,32.27 v10.29,28.15 | v11.66,22.82 v9.83,22.82
GND  (via drill 0.15, 0.35)
  Top 0.152: J4.A12_B1 21.27,28.78 J4.SH4 20.73,28.76 20.73,28.61 21.72,27.62 21.72,24.8 | J4.A1_B12 28.79,28.2 J4.SH3 29.19,28.53 29.19,27.92 27.51,26.25 26.14,26.25 25.91,26.48 25.91,26.63 R1_USB.1 25.84,26.7 23.78,26.7 R2_USB.2 23.7,26.63 23.7,26.25 22.37,24.91 | J2.3 J2.5 18.95,10.55 20.68,8.82 v20.96,8.82 | 24.43,23.09 24.39,23.12 C25.2 | 24.43,23.09 25.53,21.98 25.99,21.98 26.06,22.06 26.24,22.06 C23.1 | C25.2 24.92,24.72 26.37,24.72 26.82,24.27 C21.2 | C25.2 | 22.98,23.01 23.02,23.05 24.39,23.05 24.43,23.09 | 22.98,23.01 22.56,22.59 22.56,21.52 SJ1.1 | D3.2 31.86,31.81 32.39,32.34 32.39,33.18 32.35,33.22 | 32.35,33.22 32.24,33.33 29.8,33.33 29.42,32.95 J4.SH1 | X1.2 19.51,21.14 19.28,21.14 18.14,22.29 X1.4 18.14,22.36 18.14,23.05 19.28,24.19 C33.2 20.81,24.19 | 22.37,24.91 22.25,24.8 21.72,24.8 | 21.72,24.8 21.42,24.8 20.81,24.19 | 20.81,24.19 C24.1 | 22.98,23.01 22.94,23.05 22.94,23.73 22.41,24.27 22.41,24.88 22.37,24.91 | v13.87,21.9 14.1,21.68 14.48,21.68 EPD_C2.1 | v13.87,22.67 14.25,22.67 14.48,22.9 EPD_C6.1 14.48,22.97 EPD_C7.1 | EPD_C8.1 14.48,25.48 13.49,26.48 13.49,26.7 EPD_C5.1 13.49,26.78 v13.49,28.31 | EPD_C7.1 14.48,25.41 EPD_C8.1 | EPD_C7.1 | EPD_C9.1 10.37,25.64 10.37,25.41 9.07,24.11 9.03,24.15 | 9.03,24.15 7.39,25.79 EPD_C12.1 7.9,25.29 J1.MP1 | EPD_C1.1 14.48,19.16 EPD_C11.1 14.48,19.09 14.48,18.55 | 10.64,19.72 J1.8 | 10.63,15.22 J1.17 | 14.48,16.72 D4.1 | 7.92,10.95 J1.MP2 8.66,11.76 9.7,11.76 | 14.48,18.55 14.48,16.8 D4.1 | 10.53,19.72 J1.8 | 14.48,18.55 15.85,18.55 16.23,18.93 16.23,25.64 15.85,26.02 15.09,26.02 14.56,25.48 EPD_C8.1 | EPD_C10.1 1.83,25.94 1.83,28.38 2.14,28.69 2.29,28.69 R2_EP_DR.1 v2.29,29.14
  Top 0.152: v8.39,31.58 8.31,31.66 6.63,31.66 5.57,30.59 4.2,30.59 C1-EP-DR.2 | IC2.B3 38.48,23.05 39.09,23.05 39.32,22.82 39.32,22.29 37.8,20.76 C32.1 37.8,20.69 37.04,21.45 37.04,22.74 37.34,23.05 37.42,23.05 IC2.B1 37.42,23.12 37.04,23.5 37.04,24.5 37.65,25.1 37.65,26.09 37.49,26.25 36.88,26.25 36.88,26.7 C13.2 36.81,26.78 36.81,26.93 35.78,27.96 | 32.96,27.73 33,27.77 33,28 C4.2 | 32.96,27.73 32.77,27.54 32.24,27.54 31.78,28 C2.2 | C3.2 35.74,28 35.78,27.96 | 34.71,27.66 34.83,27.54 35.36,27.54 35.78,27.96 | 34.71,27.66 34.68,27.7 34.68,28.31 34.37,28.61 34.37,29.22 C1.2 | 32.96,27.73 33.61,27.09 34.14,27.09 34.71,27.66 | 29.72,24.65 29.95,24.88 29.95,25.56 U1.P$B7 30.03,25.64 29.87,25.79 29.87,26.17 30.1,26.4 31.02,26.4 | U1.P$F23 34.22,24.34 33.53,24.34 33.3,24.57 U1.P$74 | 29.72,22.21 29.72,21.07 U1.P$87 29.8,21.07 30.87,21.07 U1.P$88 | 29.72,22.21 U1.P$83 | 29.72,22.21 U1.P$74 | 30.33,24.04 29.72,23.43 U1.P$79 | 29.72,24.65 U1.P$75 | 29.72,24.65 U1.P$74 | U1.P$84 30.94,22.29 30.94,22.59 U1.P$74 | U1.P$74 31.55,22.82 32.08,22.29 U1.P$85 32.16,22.21 33.23,22.21 U1.P$86 33.23,22.13 33.23,21.07 U1.P$90 | U1.P$80 30.94,23.43 U1.P$74 | 30.33,24.04 30.87,24.57 U1.P$76 | 30.33,24.04 U1.P$74 | U1.P$81 32.08,23.43 U1.P$74 | U1.P$77 32.16,24.57 32.69,24.04 U1.P$74 | U1.P$82 33.23,23.43 32.69,23.96 U1.P$74 | U1.P$78 33.3,24.65 U1.P$74 | v40.77,18.4 40.7,18.32 40.7,17.87 C11.2 | 24.46,8.72 C37.1 24.7,8.92 v25.06,8.92 | 28.65,14.05 R3.1 28.58,14.13 | 21.26,18.09 21.26,16.8 21.42,16.65 R9.1 | 21.26,18.09 IC1.D2 | 21.26,18.09 21.72,18.09 21.8,18.02 22.71,18.02 24.24,19.54 C39.2 24.31,19.54 24.84,19.54 25.38,19.01 25.45,19.01 IC9.B1 25.53,19.01 25.53,18.7 IC9.C1 25.61,18.63 25.91,18.63 IC9.C2 25.99,18.63 26.29,18.63 IC9.C3 26.37,18.63 27.44,18.63 27.82,19.01 v28.81,19.01
  Top 0.152: IC3.9 28.88,17.56 29.34,17.56 IC3.8 29.42,17.48 v29.42,17.03 | SW_UP.1 13.91,4.76 14.02,4.76 14.63,4.15 16.62,4.15 C30.1 16.69,4.15 18.67,6.13 24.01,6.13 | 24.01,6.13 24.01,5.14 24.31,4.83 SW_ENT.1 24.78,4.76 24.92,4.76 25.53,4.15 28.12,4.15 C31.1 28.12,4.23 28.12,4.99 30.03,6.89 30.03,8.34 | 24.01,6.13 24.01,6.36 24.31,6.66 24.46,6.66 C38.1 | 30.03,8.34 30.03,9.03 TP_BAT_GND.TP 30.03,8.34 | U3.4 41.53,3.77 41.84,3.77 42.52,4.45 U3.9 | U3.9 42.52,4.53 41.84,5.22 41.53,5.22 U3.1 41.46,5.29 41.08,5.29 39.63,6.74 39.25,6.74 C27.1 | U3.6 43.44,4.3 42.75,4.3 42.6,4.45 U3.9 | C27.1 39.17,6.74 39.17,7.35 40.54,8.72 TP_GND.TP 40.54,8.8 40.54,12.38 41.46,13.29 C15.2 41.53,13.37 41.91,13.75 41.91,15.27 C16.2 41.91,15.35 41.91,15.5 41.61,15.81 41.46,15.81 | C27.1 39.09,6.66 38.48,6.66 37.87,6.05 37.87,4.99 C29.1 37.8,4.91 36.17,4.91 SW_DN.1 35.51,4.11 35.51,5.67 32.85,8.34 30.03,8.34 | C34.1 39.09,20.61 38.94,20.61 38.41,20.08 38.41,17.41 C9.2 | 38.33,17.18 38.33,17.33 C9.2 | 39.32,15.81 39.32,16.57 38.48,17.41 C9.2 | 39.32,15.81 39.32,15.43 C10.2 | v36.88,19.09 36.88,20.23 C8.2 | 35.74,13.14 C14.2 | C42.2 31.7,29.22 32.46,29.22 33.3,30.06 36.66,30.06 37.42,29.3 C20.2 37.49,29.22 38.1,28.61 | 38.1,28.61 C22.2 38.18,28 38.18,26.7 38.64,26.25 39.09,26.25 39.32,26.48 39.32,26.7 C17.2 39.85,26.73 40.39,26.19 40.39,25.71 40.12,25.45 | 38.1,28.61 39.17,28.61 39.63,29.07 C43.2 | 39.4,25.41 C18.2 39.48,25.41 40.09,25.41 40.12,25.45 | 44.66,17.41 C6.2 44.66,17.33 44.51,17.18 | 33.1,17.55 C7.2 33.03,17.48 | 41.46,15.81 39.32,15.81 | 32.35,33.22 32.39,33.26 33.23,33.26 33.76,33.79 35.29,33.79 39.63,29.45 39.63,29.22 C43.2
  Top 0.152: 39.63,29.14 C43.2 | J1.17 10.67,15.27 10.9,15.27 11.13,15.5 11.13,19.54 10.98,19.69 10.67,19.69 J1.8 | J1.8 10.52,19.85 10.14,19.85 9,20.99 9,24.11 9.03,24.15 | 9.7,11.76 10.06,11.39 11.05,11.39 12.81,13.14 12.81,15.12 14.41,16.72 D4.1 | 9.7,11.76 9.38,12.07 9.38,14.44 10.21,15.27 10.52,15.27 J1.17 | 41.46,15.81 41.46,22.36 40.16,23.66 40.16,25.41 40.12,25.45
  Route2 0.152: v25.06,8.92 25.06,8.62 23.66,7.22 22.56,7.22 v20.96,8.82
  Bottom 0.152: J4.SH1 29.42,32.88 29.42,28.84 J4.SH3 | v13.87,22.67 v13.87,21.9 | 13.49,31.58 19.36,31.58 19.4,31.62 | 13.49,31.58 v8.39,31.58 7.24,32.72 4.96,32.72 2.29,30.06 v2.29,29.14 | 19.4,31.62 20.65,32.88 J4.SH2 | 19.4,31.62 20.65,30.36 20.65,28.84 J4.SH4 | 13.49,31.58 v13.49,28.31 | v40.77,18.4 37.49,18.4 36.85,19.05 | 36.85,19.05 34.9,20.99 33.3,20.99 U1.P$90 33.23,20.99 32.24,20.99 U1.P$89 32.16,20.99 32.31,20.84 32.31,18.7 32.01,18.4 31.4,18.4 30.03,17.03 v29.42,17.03 | v28.81,19.01 28.81,17.64 v29.42,17.03 | 29.34,17.03 v29.42,17.03 | v36.88,19.09 36.85,19.05
  other vias: 42.66,28.02 11.36,6.02 15.86,28.02 32.66,11.82 35.96,17.22 24.26,18.42 17.76,32.92 32.06,14.72 35.66,21.22 37.16,21.52
  pour Top: 42.31,20.48 42.3,20.51 42.3,25.93 42.31,25.96 42.32,25.97 42.35,25.98 42.37,25.98 42.4,25.97 42.49,25.88 47.33,25.88 47.5,26.05 47.5,31.79 42.73,36.56 -1.31,36.56 -4.28,33.59 -4.28,-0.82 46.43,-0.82 47.4,0.15 47.4,19.79 47.03,20.16 42.65,20.16 42.62,20.17
  pour Route2: 42.72,25.77 42.75,25.78 46.93,25.78 47.1,25.95 47.1,37.19 46.83,37.46 -3.41,37.46 -3.78,37.09 -3.78,-0.35 -3.61,-0.52 48.4,-0.52 48.4,18.39 47.23,19.56 43.15,19.56 43.12,19.57 42.61,20.08 42.6,20.11 42.6,25.63 42.61,25.66
  pour Bottom: 42.52,25.77 42.55,25.78 46.73,25.78 47.8,26.85 47.8,36.69 47.43,37.06 -3.81,37.06 -10.28,30.59 -10.28,-2.15 -9.11,-3.32 49.93,-3.32 50.5,-2.75 50.5,19.09 49.73,19.86 42.45,19.86 42.42,19.87 42.41,19.88 42.4,19.91 42.4,19.93 42.41,19.96 42.5,20.05 42.5,25.73 42.51,25.76
IMU_INT1  (via drill 0.15)
  Top 0.152: U1.P$N1 25.81,22.57 v25.76,22.52 | IC3.5 31.33,16.49 v31.36,16.52
  Route15 0.152: v25.76,22.52 25.76,16.02 25.86,15.92 31.26,15.92 31.36,16.02 v31.36,16.52
IMU_INT2  (via drill 0.15)
  Top 0.152: U1.P$P2 27.56,22.32 27.46,22.22 v27.46,21.82 | IC3.6 29.98,16.92 v30.66,16.92
  Route15 0.152: v27.46,21.82 30.66,18.62 v30.66,16.92
LX1  (via drill 0.15)
  Top 0.152: IC9.B2 25.99,19.01 26.29,19.01 IC9.B3 26.37,19.01 v26.83,19.01 | v25.84,11.85 25.84,11.31 25.07,10.55 L7.1
  Bottom 0.152: v26.83,19.01 26.83,18.32 25.84,17.33 v25.84,11.85
LX2  (via drill 0.15, 0.35)
  Top 0.152: v27.06,16.72 27.06,17.84 26.66,18.24 IC9.D3 26.29,18.25 25.99,18.25 IC9.D2 | v27.16,12.12 27.16,10.54 L7.2
  Route2 0.152: v27.06,16.72 27.16,16.62 v27.16,12.12
N$1  (via drill 0.15)
  Top 0.152: 32.77,26.09 U1.P$A18 32.75,26.13 32.46,26.42 31.66,26.42 31.06,27.02 v30.76,27.02 | 36.27,26.7 C13.1 36.35,26.73 36.36,26.72 35.96,26.72 v35.66,27.02
  Route15 0.152: v30.76,27.02 v35.66,27.02
  Bottom 0.152: v35.66,27.02 34.86,27.02 34.76,26.92 30.86,26.92 v30.76,27.02
N$2  (via drill 0.15, 0.35)
  Top 0.152: U1.P$AC5 28.41,20.07 v28.36,20.12 | C20.1 36.56,29.17 v36.56,28.42
  Route2 0.152: v28.36,20.12 30.06,18.42 35.86,18.42 36.56,19.12 v36.56,28.42
N$3
  Top 0.152: U1.P$N24 34.75,22.51 35.29,22.51 37.42,20.38 37.42,17.79 37.8,17.41 C9.1
N$4
  Top 0.152: U1.P$B3 29.04,25.64 29.04,26.55 30.41,27.92 30.48,27.92 31.4,28.84 32.54,28.84 33.46,29.75 34.52,29.75 34.98,29.3 L2.1
N$5
  Top 0.152: L2.2 35.59,29.22 35.59,28.69 38.48,25.79 38.48,24.88 40.39,22.97 40.39,19.54 40.16,19.31 40.16,19.16 L3.1
N$6  (via drill 0.15)
  Top 0.152: 39.97,13.87 40.47,13.37 C15.1 | 39.97,13.87 38.87,14.97 38.87,15.35 C10.1 38.87,15.43 38.87,16.27 v38.94,16.34 | 39.97,13.87 41.38,15.27 C16.1 | v36.05,24.57 U1.P$E24 | v29.72,26.63 29.72,26.48 29.57,26.32 29.57,25.64 U1.P$B5 | 39.9,18.66 39.7,18.86 39.7,19.85 40.01,20.15 v40.01,21.52 | 39.9,18.66 39.93,18.63 40.39,18.63 40.62,18.86 40.62,19.09 L3.2 | v39.7,16.34 39.7,18.48 39.9,18.66
  Bottom 0.152: v36.05,24.57 36.12,24.57 36.35,24.8 36.35,25.26 36.05,25.56 35.74,25.56 35.32,25.98 | 35.32,25.98 34.68,26.63 v29.72,26.63 | v40.01,21.52 40.01,22.9 37.42,25.48 37.04,25.48 36.2,26.32 35.67,26.32 35.32,25.98 | v39.7,16.34 v38.94,16.34
N$7
  Top 0.152: U1.P$C1 28.2,25.03 27.33,25.03 C5.1
N$8  (via drill 0.15)
  Top 0.152: v28.73,25.26 28.73,24.88 U1.P$D2 | 38.87,26.93 38.87,26.78 C17.1 38.87,26.93 | 38.87,26.93 v38.87,27.31 38.87,27.39 40.16,28.69 40.16,30.82 38.56,32.42 X2.2
  Bottom 0.152: v28.73,25.26 34.07,25.26 39.32,20 41,20 41.15,20.15 41.15,22.21 38.87,24.5 v38.87,27.31
N$9  (via drill 0.15)
  Top 0.152: v28.43,24.57 28.5,24.57 28.73,24.34 U1.P$F2 | v40.01,25.94 39.17,25.94 38.87,25.64 38.87,25.48 C18.1 | v40.77,25.94 40.85,25.94 41.08,26.17 41.08,32.42 X2.1
  Route15 0.152: v28.43,24.57 28.73,24.57 29.42,25.26 34.75,25.26 36.92,23.09 | 36.96,23.05 36.92,23.09 | v40.01,25.94 39.78,25.94 36.92,23.09
  Bottom 0.152: v40.77,25.94 v40.01,25.94
N$10  (via drill 0.15)
  Top 0.152: v35.97,25.94 35.89,25.87 35.89,25.56 35.44,25.1 34.75,25.1 34.52,24.88 34.29,24.88 U1.P$D23 | v40.77,20.38 40.77,19.69 41.15,19.31 41.15,17.64 40.85,17.33 40.47,17.33 40.16,17.64 40.16,17.79 C11.1
  Bottom 0.152: v35.97,25.94 36.12,25.94 38.48,23.58 38.48,22.44 40.54,20.38 v40.77,20.38
N$11  (via drill 0.15)
  Top 0.152: v34.68,26.02 34.29,26.02 U1.P$A23 | v31.48,27.47 31.25,27.7 C2.1 | v21.42,22.9 20.81,22.29 19.59,22.29 X1.3
  Route2 0.152: v34.68,26.02 33.84,26.02 32.39,27.47 v31.48,27.47 29.87,27.47 27.89,25.48 25.45,25.48 22.86,22.9 v21.42,22.9
N$12  (via drill 0.15)
  Top 0.152: v35.21,25.48 35.13,25.56 U1.P$B24 | v33.91,28.53 33.91,29.14 33.84,29.22 C1.1 | v20.81,21.9 20.81,21.07 20.12,20.38 18.98,20.38 18.29,21.07 18.14,21.07 X1.1
  Route2 0.152: v35.21,25.48 35.21,27.24 v33.91,28.53
  Route15 0.152: v20.81,21.9 24,21.9 30.03,27.92 33.3,27.92 v33.91,28.53
N$13  (via drill 0.15)
  Top 0.152: v32.85,28.53 32.54,28.23 32.54,28 C4.1 | v33.91,27.47 33.99,27.47 34.29,27.77 L1.2 | v37.11,28 C22.1 | v43.59,25.48 44.43,24.65 ANT1.1
  Bottom 0.152: v33.91,27.47 33.68,27.7 | 33.68,27.7 v32.85,28.53 | 33.68,27.7 34.9,28.91 35.36,28.91 35.4,28.88 36.27,28 v37.11,28 39.32,28 41.84,25.48 v43.59,25.48
N$14  (via drill 0.15)
  Top 0.152: v37.27,25.87 37.27,25.18 36.27,24.19 34.9,24.19 34.6,23.89 34.29,23.89 U1.P$H23 | v35.13,28.53 35.13,28.08 C3.1 | v33.38,28.61 33.38,28.38 33.76,28 L1.1
  Bottom 0.152: v37.27,25.87 37.27,26.4 35.4,28.27 | v35.13,28.53 35.4,28.27 | v33.38,28.61 33.07,28.91 32.62,28.91 32.46,28.76 32.46,28.31 33.68,27.09 34.22,27.09 35.4,28.27
N$15
  Top 0.152: IC9.D1 25.53,18.25 25.45,18.25 25,17.79 25,16.42 24.54,15.96 R4.2
N$16
  Top 0.152: IC9.E1 25.53,17.79 25.53,16.42 24.69,15.58 21.26,15.58 19.28,17.56 19.28,17.79 R2.2
N$17
  Top 0.152: IC1.D1 20.81,18.09 20.81,16.57 21.42,15.96 R9.2
N$18  (via drill 0.15)
  Top 0.152: EPD_C2.2 15.47,21.68 14.86,22.29 12.5,22.29 11.78,21.56 | 11.78,21.56 11.59,21.38 | v9.83,21.68 10.44,21.68 10.52,21.75 J1.4 | v11.74,21.6 11.78,21.56
  Bottom 0.152: v11.74,21.6 9.91,21.6 v9.83,21.68
N$19  (via drill 0.15)
  Top 0.152: EPD_C1.2 15.47,20.38 14.79,21.07 12.04,21.07 v11.97,21.14 | v9.83,21.22 10.52,21.22 J1.5
  Bottom 0.152: v9.83,21.22 11.89,21.22 v11.97,21.14
N$20  (via drill 0.15)
  Top 0.152: v15.47,22.29 15.47,22.9 EPD_C6.2 | 10.45,14.69 J1.18 10.6,14.82 10.98,14.82 v11.51,15.35
  Bottom 0.152: v15.47,22.29 15.47,21.9 11.51,17.94 v11.51,15.35
N$21  (via drill 0.15)
  Top 0.152: v15.85,23.58 15.55,23.89 15.55,24.19 EPD_C7.2 | 10.54,14.23 J1.19 10.6,14.28 11.05,14.28 v11.28,14.51
  Bottom 0.152: v15.85,23.58 15.85,21.83 12.2,18.17 12.2,15.43 v11.28,14.51
N$22  (via drill 0.15)
  Top 0.152: v15.47,24.8 15.47,25.41 EPD_C8.2 | 10.53,13.8 J1.20 10.6,13.83 v11.2,13.83
  Bottom 0.152: v15.47,24.8 15.47,22.9 10.9,18.32 10.9,14.28 11.2,13.98 v11.2,13.83
N$23
  Top 0.152: IC3.1 28.35,15.96 28.35,14.97 27.74,14.36 27.74,13.9 28.05,13.6 28.58,13.6 R3.2
N$24  (via drill 0.15)
  Top 0.152: v4.2,28.23 4.65,28.69 4.8,28.69 R_TYPE_SEL.1 | v3.2,27.24 3.2,26.25 2.9,25.94 EPD_C10.2 | 10.52,12.71 J1.22 10.52,12.76 10.21,12.76 9.76,13.22 v9.76,13.98
  Route2 0.152: v3.2,27.24 v4.2,28.23 4.2,28.15 4.96,28.15 9.03,24.08 | 9.03,24.08 9.07,24.04 | v9.76,13.98 9,14.74 9,24.04 9.03,24.08
N$25  (via drill 0.15)
  Top 0.152: v8.84,25.33 8.39,25.79 EPD_C12.2 | 10.78,12.02 J1.24 10.67,11.85 11.05,11.85 12.42,13.22 v12.42,20.46
  Bottom 0.152: v8.84,25.33 8.84,24.42 v9.6,23.66 10.06,23.2 11.89,23.2 12.42,22.67 v12.42,20.46
N$26
  Top 0.152: IC2.A2 37.95,23.66 38.33,24.04 38.87,24.04 39.63,23.28 39.63,21.83 38.26,20.46 38.26,20.38 38.03,20.15 37.87,20.15 C32.2
N$27
  Top 0.152: L5.2 5.34,25.94 5.34,26.17 4.2,27.31 3.74,27.31 2.75,28.31 2.75,30.06 2.67,30.13 2.67,30.97 3.13,31.43 3.66,31.43 4.2,31.96 C2-EP-DR.2 4.27,31.96 9.45,31.96 9.6,31.81 Q3.3 12.42,31.81 13.03,31.2 13.03,30.06 12.04,29.07 12.04,28.53 D5.2
N$28
  Top 0.152: C2-EP-DR.1 3.28,32.04 4.5,33.26 12.65,33.26 12.81,33.41 15.17,33.41 17.84,30.74 D2.1 17.84,30.67 17.07,29.91 17.07,20.84 17.99,19.92 17.99,16.72 D4.2
N$29  (via drill 0.15)
  Top 0.152: R_TYPE_SEL.2 4.88,28.15 6.25,28.15 R1_EP_DR.1 6.33,28.15 6.94,28.15 9.68,25.41 v9.68,25.33 | v23.17,22.59 24.01,21.75 24.01,21.52 SJ1.2
  Route15 0.152: v9.68,25.33 20.43,25.33 v23.17,22.59
N$30
  Top 0.152: R1_USB.2 26.37,26.7 26.37,28.08 26.29,28.15 J4.A5
N$31
  Top 0.152: R2_USB.1 23.24,26.7 23.24,28.15 J4.B5
OUT+  (via drill 0.15)
  Top 0.152: v38.87,23.43 38.71,23.58 38.48,23.58 IC2.A3 | v38.56,16.72 38.56,15.81 38.48,15.73 38.48,13.67 39.63,12.53 39.63,10.17 36.73,7.27 TP_OP.TP
  Route2 0.152: v38.87,23.43 38.87,23.12 38.56,22.82 v38.56,16.72
OUT-  (via drill 0.15)
  Top 0.152: v38.94,22.59 38.48,22.59 IC2.C3 | v42.29,14.44 42.29,10.4 43.74,8.95 TP_ON.TP
  Route2 0.152: v38.94,22.59 38.94,17.79 v42.29,14.44
P0.13/1.5D  (via drill 0.15)
  Top 0.152: 17.3,3.62 17.3,3.77 17.61,4.07 C30.2 | 17.3,3.62 17.3,2.55 R5.1 | 17.3,3.62 v17.15,3.62 | v10.66,5.57 v10.65,5.57 SW_UP.2
  Bottom 0.152: v10.66,5.57 11.93,4.3 16.46,4.3 v17.15,3.62
P0.14/1.5D  (via drill 0.15)
  Top 0.152: R8.1 28.73,3.01 28.73,3.69 29.11,4.07 C31.2 29.11,4.15 v28.5,4.76 | v22.03,5.75 21.57,5.29 21.57,3.94 SW_ENT.2
  Bottom 0.152: v28.5,4.76 23.02,4.76 v22.03,5.75
P1.01/1.6C
  Top 0.152: R_PWR_EPD1.1 3.59,28.76 4.2,28.76 6.02,30.59 12.35,30.59 Q2.1
P1.02/1.6C  (via drill 0.15)
  Top 0.152: R7.1 38.87,2.78 38.87,4.91 C29.2 38.79,4.99 v38.33,5.45 | v33.07,5.67 32.69,5.29 32.69,4.04 SW_DN.2
  Bottom 0.152: v33.07,5.67 38.1,5.67 v38.33,5.45
PMIC_INT  (via drill 0.15)
  Top 0.152: U1.P$T2 28.06,21.82 27.36,21.12 v27.36,21.02 | IC1.A1 19.14,19.34 v19.06,19.42
  Route2 0.152: v27.36,21.02 27.06,21.32 27.06,23.02 27.46,23.42 v27.46,24.32
  Bottom 0.152: v27.46,24.32 21.56,24.32 19.06,21.82 v19.06,19.42
PREVGH  (via drill 0.15)
  Top 0.3: D5.1 8.54,28.46 9.07,28.46 11.36,26.17 11.36,25.71 EPD_C9.2 11.28,25.56 v11.28,23.58 11.2,23.5 11.2,21.22 11.97,20.46 11.97,13.9 11.36,13.29 10.67,13.29 J1.21 10.44,13.16
PREVGL  (via drill 0.15)
  Top 0.152: v15.55,19.77 15.55,19.16 EPD_C11.2 | v17.45,22.97 17.45,26.7 17.91,27.16 D2.2 | 10.57,12.25 J1.23 10.6,12.3 10.67,12.38 10.98,12.38 v11.2,12.61
  Bottom 0.152: v17.45,22.97 15.55,21.07 v15.55,19.77 12.5,16.72 12.5,14.51 11.2,13.22 v11.2,12.61
RESE  (via drill 0.15)
  Top 0.152: 6.71,28.76 6.86,28.76 9.38,26.25 10.67,26.25 10.9,26.02 | 6.71,28.76 6.33,28.76 R1_EP_DR.2 | v6.71,31.12 7.55,31.12 Q3.2 | 6.71,28.76 v6.71,30.21 | v9.38,22.67 9.76,22.29 10.52,22.29 J1.3
  Route15 0.152: v9.38,22.67 9.38,23.28 8.23,24.42 8.23,28.69 v6.71,30.21
  Bottom 0.152: v6.71,30.21 v6.71,31.12
RESET
  Top 0.152: J2.6 19.55,11.52 22.96,11.52 27.56,16.12 27.56,18.32 27.86,18.62 30.06,18.62 30.46,19.02 30.46,19.72 30.56,19.82 31.5,19.82 U1.P$AC13 31.75,19.82 32.96,19.82 32.96,18.53 TP_RESET.TP
SCL/2.4C  (via drill 0.15, 0.35)
  Top 0.152: U1.P$M2 v27.46,22.82 | IC3.12 28.05,16.49 27.96,16.59 v27.96,17.92 | IC1.B1 19.88,18.94 v19.86,18.92 | R4.1 24.46,16.55 v24.46,17.22 | TP_SCL.TP 3.66,3.84 6.18,3.84 11.36,9.03 11.36,9.26 R17.2 11.43,9.26 v11.89,9.26 | v39.55,7.12 42.45,7.12 44.12,5.45 44.12,5.06 43.82,4.76 43.51,4.76 U3.7
  Route2 0.152: v27.96,17.92 27.96,22.32 v27.46,22.82
  Route15 0.152: v19.86,18.92 19.86,17.22 v24.46,17.22
  Bottom 0.152: v39.55,7.12 34.52,7.12 27.74,13.9 27.74,17.71 27.89,17.87 v27.96,17.92 | v27.46,22.82 27.51,22.9 27.51,23.43 26.98,23.96 26.14,23.96 24.39,22.21 22.33,22.21 19.89,19.77 19.89,18.93 v19.86,18.92 19.82,18.86 16.62,18.86 12.81,15.05 12.81,12.45 11.89,11.54 v11.89,9.26
SDA/2.4C  (via drill 0.15, 0.35)
  Top 0.152: IC1.C1 v20.35,18.54 | v20.35,18.54 19.4,18.54 R2.1 | U1.P$L1 28.11,23.07 27.76,23.42 v26.76,23.42 | IC3.2 28.88,15.24 v28.86,15.22 | TP_SDA.TP 7.39,7.73 8.31,8.65 9.91,8.65 R18.2 9.91,8.72 v10.44,8.72 | v42.98,5.75 43.44,5.29 U3.8 | v20.35,18.55 v20.35,18.54
  Route2 0.152: v26.76,23.42 26.66,23.32 26.66,20.62 26.79,20.49 | 26.79,20.49 27.56,19.72 27.56,15.22 v28.86,15.22 | v20.35,18.55 21.34,18.55 23.24,20.46 26.75,20.46 26.79,20.49
  Bottom 0.152: v42.98,5.75 41.53,5.75 33.68,13.6 29.87,13.6 28.88,14.59 28.88,15.2 v28.86,15.22 | v10.44,8.72 12.04,8.72 14.71,6.05 19.15,6.05 21.87,8.78 21.87,17.03 v20.35,18.55
SWDCLK  (via drill 0.15, 0.35)
  Top 0.152: J2.4 16.66,13.14 v16.66,16.22 | TP_SWDCLK.TP 29.46,12.03 v29.46,14.72 | v34.29,20.15 34.68,20.53 U1.P$AA24
  Route15 0.152: v29.46,14.72 29.36,14.82 21.16,14.82 19.26,16.72 16.66,16.72 v16.66,16.22
  Bottom 0.152: v34.29,20.15 31.86,17.71 31.86,16.27 30.33,14.74 29.49,14.74 v29.46,14.72
SWDIO  (via drill 0.15)
  Top 0.152: J2.2 17.01,11.52 19.16,11.52 19.51,11.17 22.31,11.17 22.66,10.82 22.66,6.62 23.66,6.62 25.66,8.62 28.06,8.62 28.36,8.92 28.36,10.42 28.46,10.52 32.96,10.52 34.48,12.04 | 34.48,12.04 34.5,12.06 TP_SWDIO.TP | v35.21,20 34.75,20 U1.P$AC24 | v33.76,13.98 33.76,12.76 34.48,12.04
  Bottom 0.152: v35.21,20 34.75,20 34.22,19.47 34.07,19.47 33.76,19.16 v33.76,13.98
SWO  (via drill 0.15)
  Top 0.152: v34.75,17.92 34.54,17.92 33.76,18.7 33.76,19.54 U1.P$AD22 | v42.68,13.98 43.9,12.76 TP_SWO.TP
  Bottom 0.152: v34.75,17.92 36.75,17.92 40.7,13.98 v42.68,13.98
VBAT/1.2A  (via drill 0.15)
  Top 0.3: v38.64,6.21 39.02,6.21 C27.2 39.17,6.13 39.63,6.13 41,4.76 41.46,4.76 U3.2 41.53,4.61 41.53,4.3 U3.3 | v28.73,6.21 28.12,6.21 27.28,7.05 TP_VBAT.TP
  Bottom 0.3: v28.73,6.21 v38.64,6.21
VBAT/2.5C  (via drill 0.35)
  Top 0.152: IC1.C2 22.04,18.54
  Top 0.4: 22.04,18.54 v22.06,18.52 | C37.2 24.45,8.12 v23.66,8.12
  Route2 0.4: v22.06,18.52 23.66,16.92 v23.66,8.12
VBUS/1.5D  (via drill 0.15, 0.35)
  Top 0.152: v27.46,26.92 27.44,26.94
  Top 0.3: 31.25,29.3 31.25,29.52 31.93,30.21 32.24,30.21 33.07,31.05 33.07,31.28 33.61,31.81 D3.5 34.14,31.73 34.52,31.73 34.9,31.35 36.43,31.35 38.64,29.14 C43.1 | 31.25,29.3 C42.1 | 31.25,29.3 v30.26,28.31
  Top 0.4: J4.A9_B4 22.64,25.94 v22.66,25.92 | v27.46,26.92 27.46,28.19 J4.A4_B9
  Route2 0.4: v22.66,25.92 26.46,25.92 v27.46,26.92
  Bottom 0.3: v30.26,28.31 30.26,27.85 29.34,26.93 27.51,26.93 v27.46,26.92
VBUS/2.6D  (via drill 0.15, 0.35)
  Top 0.152: IC1.A2 21.21,20.27
  Top 0.3: v27.05,19.62 28.73,19.62 U1.P$AD2 | v25.61,7.96 25.61,7.12 24.69,6.21 24.54,6.21 C38.2 | v25.99,23.2 25.99,24.19 C21.1
  Top 0.4: 21.21,20.27 v21.16,20.32
  Bottom 0.3: 25.38,19.62 21.87,19.62 21.19,20.3 v21.16,20.32 | 25.38,19.62 26.37,19.62 | 26.37,19.62 v27.05,19.62 | v25.61,7.96 25.61,11.39 25.38,11.62 25.38,19.62 | v25.99,23.2 26.37,22.82 26.37,19.62
VREG  (via drill 0.15)
  Top 0.152: IC1.B2 21.48,18.94 22.1,19.56 22.1,19.77
  Top 0.3: v21.57,20.84 21.57,22.36 21.87,22.67 21.87,24.19 C24.2 | v22.1,20.3 22.1,19.77 22.21,19.67 | C39.1 23.32,19.77 23.78,20.23 24.77,20.23 25.45,19.54 IC9.A1 25.61,19.47 25.91,19.47 IC9.A2 26.06,19.47 26.29,19.47 IC9.A3 26.35,21.48 C23.2 | v32.31,8.72 33.38,9.79 34.9,9.79 TP_VREG.TP | 23.02,19.72 v23.02,18.93
  Top 0.4: 22.21,19.67 22.26,19.72 23.02,19.72 23.16,19.72 C39.1
  Bottom 0.3: v22.1,20.3 v21.57,20.84 | v32.31,8.72 32.31,8.19 31.63,7.5 25.38,7.5 23.02,9.86 v23.02,18.93